# Allegro board board1.brd
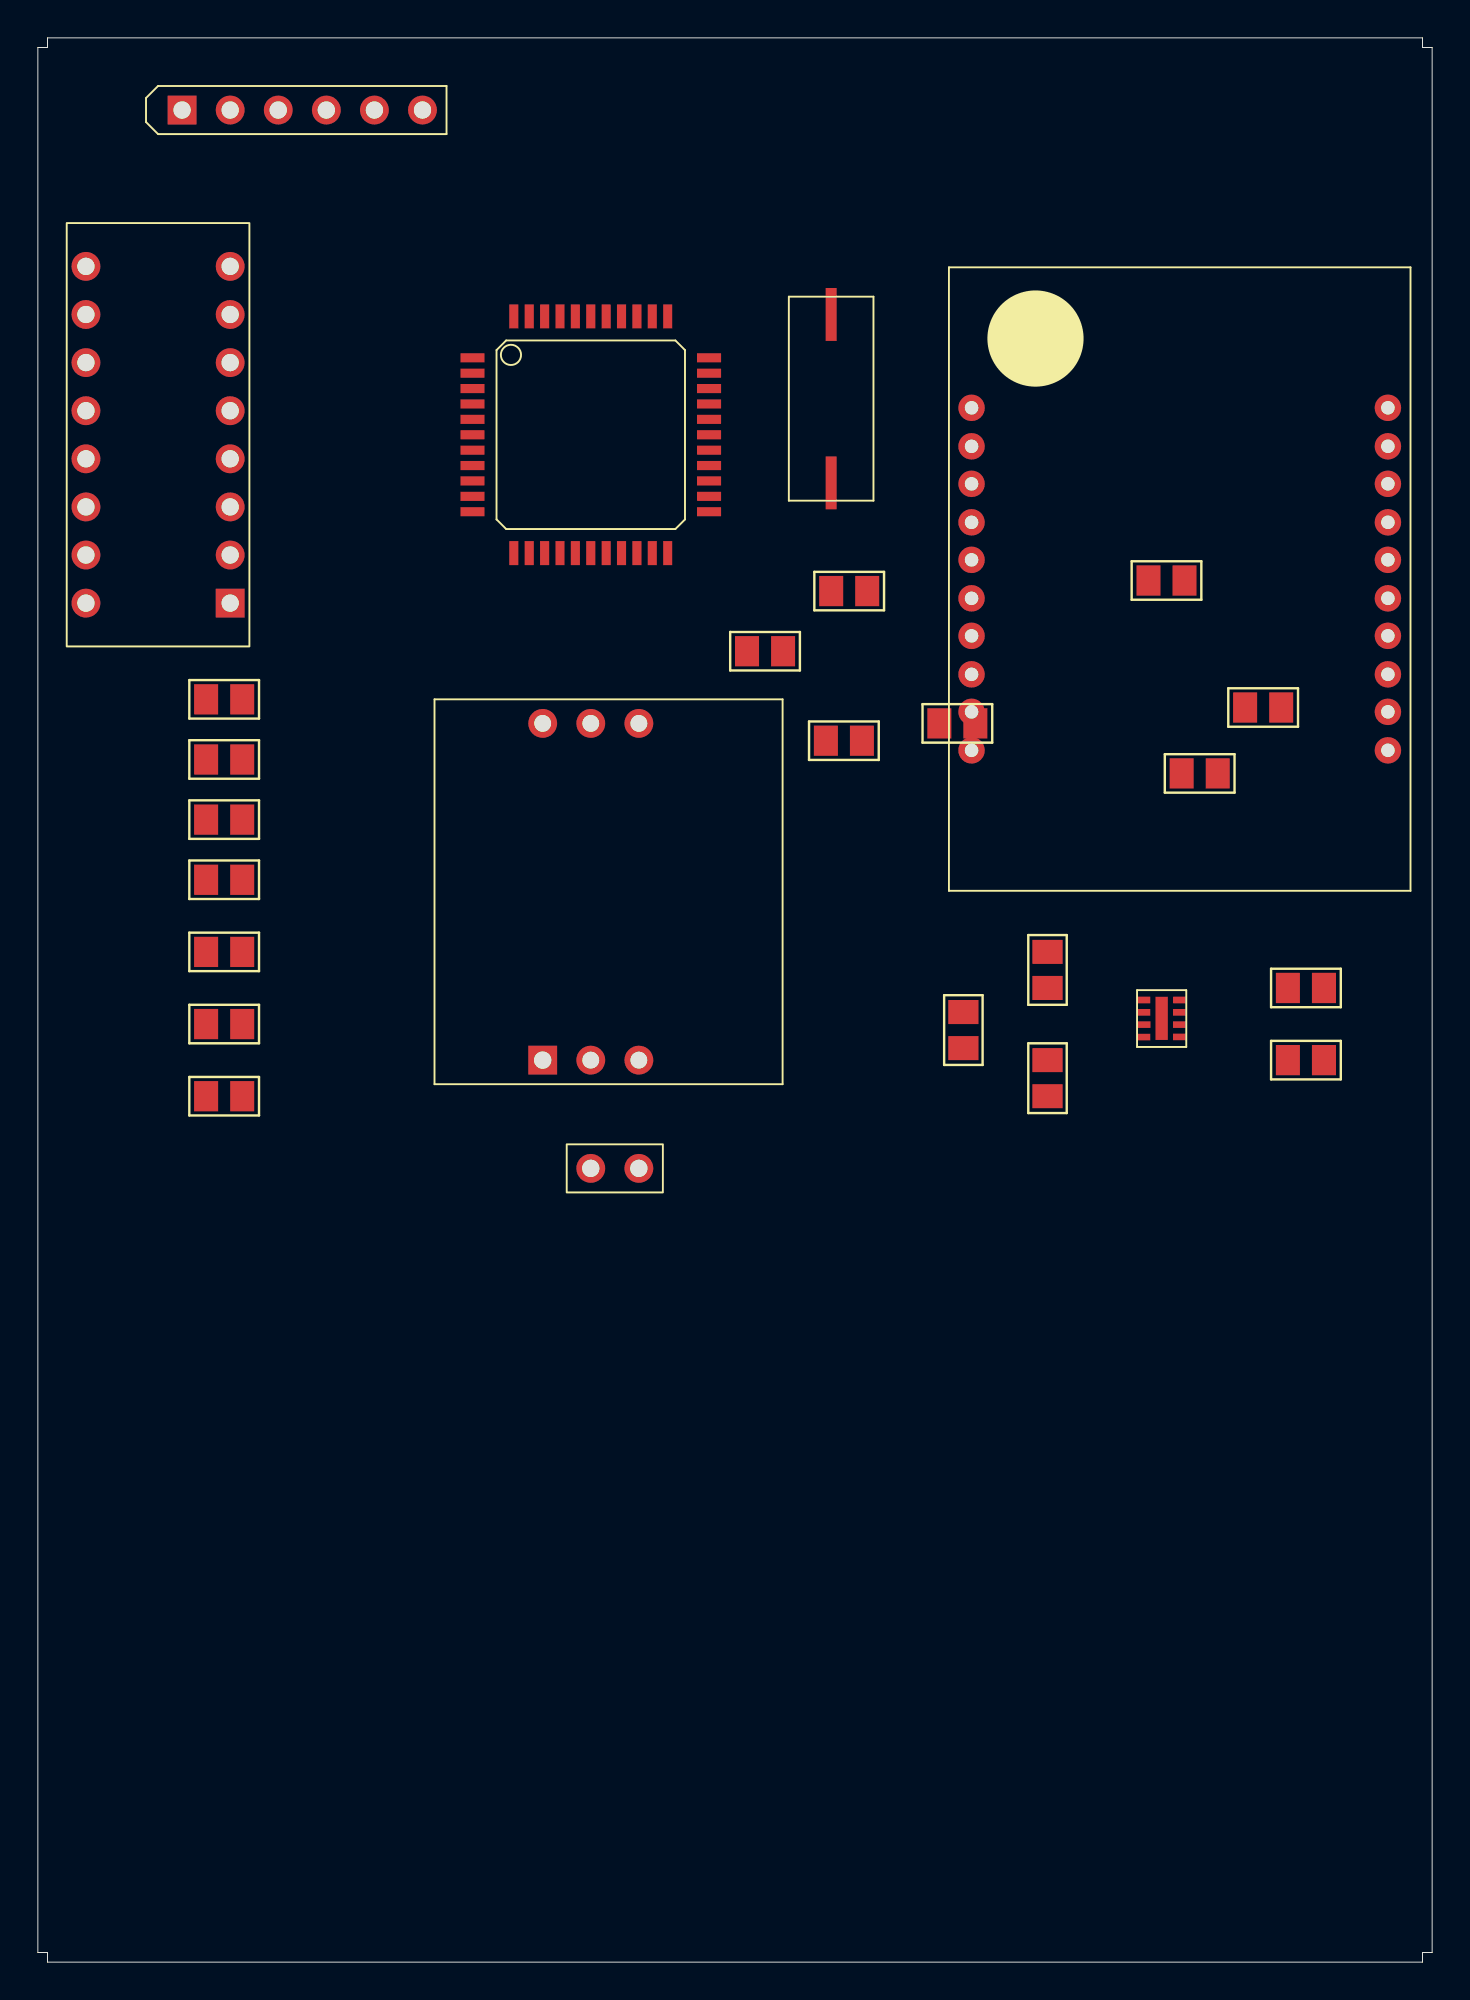
[diagram p0: board, top side]
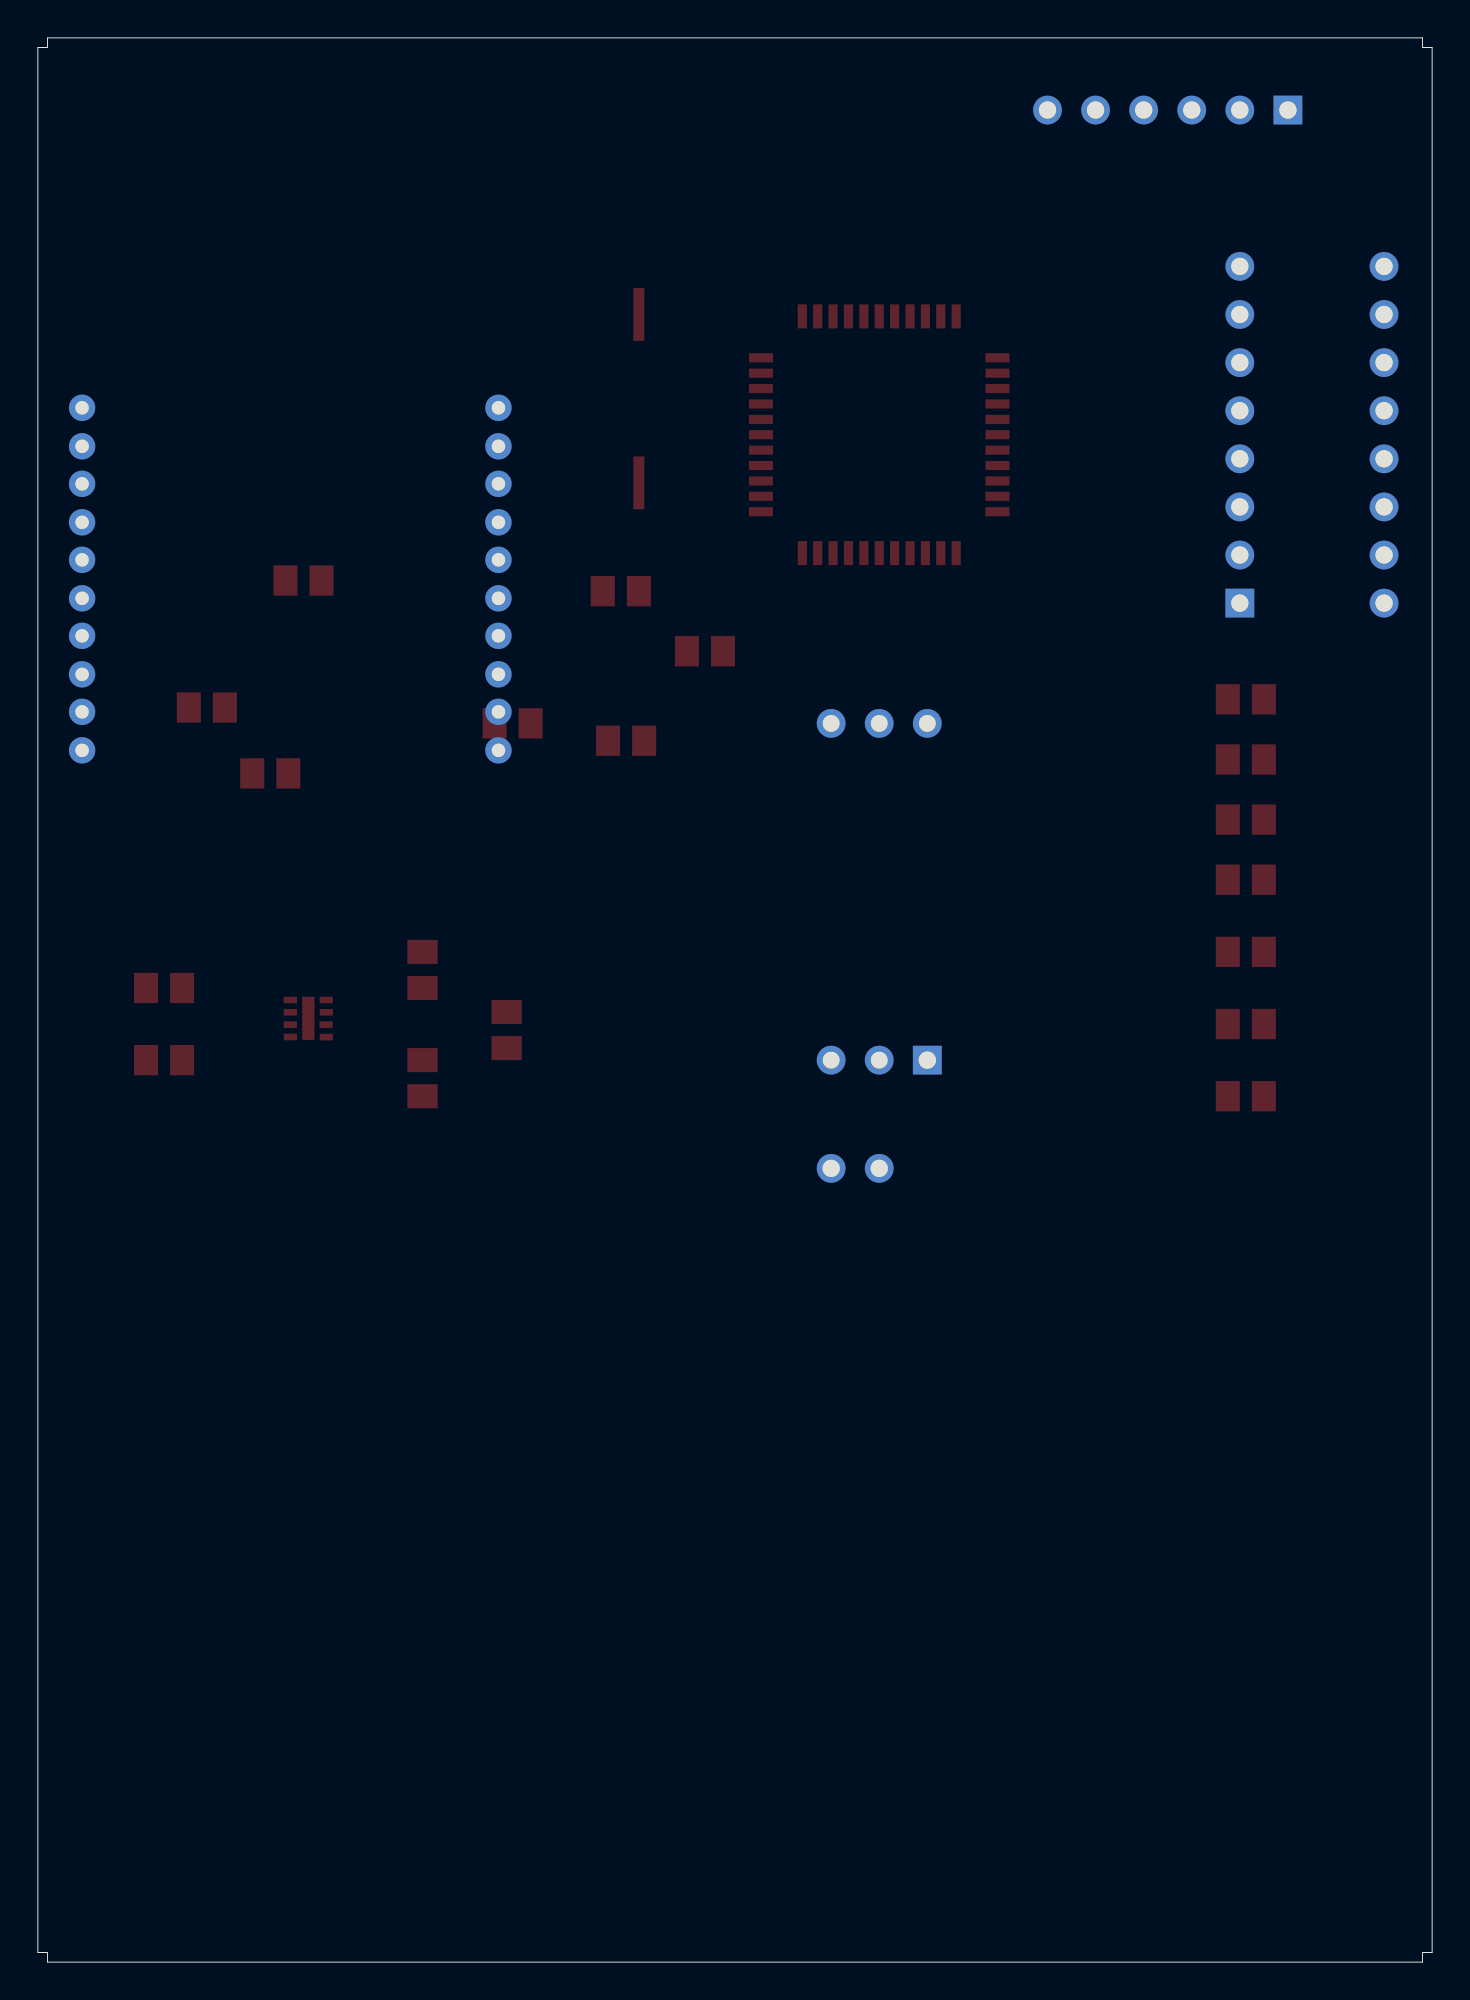
[diagram p1: board, bottom side, seen from below]

Outline 73.66 x 101.6 mm; copper layers: TOP, BOTTOM. Coordinates in mm from the lower left corner of the outline.
Outline path: 0,101.09 0.51,101.09 0.51,101.6 73.15,101.6 73.15,101.09 73.66,101.09 73.66,0.51 73.15,0.51 73.15,0 0.51,0 0.51,0.51 0,0.51 0,101.09

## Design rules (mm)
nets with their own width: min track width 0.381; nets CAPTEURRX CAPTEURTX N45185 N45221 N45265 N45305 N56544 N56546 N56548 N56550 N56552 N56554 N56556 N56558 N61373 N61405 N73074 N73078 XBEEDIN XBEEDOUT XBEERESET XBEESLEEP
nets with their own width: min track width 0.635; nets 3.3V 4.2V 5V GND

## Placement (name value [footprint] x y rotation side)
C1  10.0uF  [C_0805]  67.94 47.62 180 top
C2  10.0uF  [C_0805]  53.34 45.72 90 top
C3  470pF  [C_0805]  67.94 51.43 180 top
C4  27pF  [C_0805]  37.46 69.22 0 top
C5  27pF  [C_0805]  41.91 72.39 0 top
C6  10uF  [C_0805]  47.62 65.41 0 top
C7  0.1 uF  [C_0805]  63.78 66.24 0 top
C8  0.1 uF  [C_0805]  58.67 72.95 0 top
J1  Convertion Board  [CONDUCTIVITY_SENSOR]  20.95 46.35 90 top
J2  BNC au capteur  [JUMPER2]  29.21 41.91 0 top
J3  Xbee  [XBEE]  60.33 73.03 0 top
J4  Connecteur PicKit  [SIP6]  7.62 97.79 90 top
R1  80.6k  [R_0805]  53.34 53.34 270 top
R2  69.8k  [R_0805]  48.89 48.26 90 top
R3  4.7K  [R_0805]  60.43 62.76 0 top
R4  10K  [R_0805]  8.89 66.67 0 top
R5  10K  [R_0805]  8.89 63.5 0 top
R6  10K  [R_0805]  8.89 60.32 0 top
R7  10K  [R_0805]  8.89 57.15 0 top
R8  10K  [R_0805]  8.89 53.34 0 top
R9  10K  [R_0805]  8.89 49.53 0 top
R10  10K  [R_0805]  8.89 45.72 0 top
R11  10K  [R_0805]  41.63 64.49 0 top
SW1  SW DIP-8  [DIPSWITCH]  10.16 71.75 180 top
U1  LM104/TO  [LMZ10500_2]  58.42 50.8 0 top
U2  PIC18F47J13  [PQFP44]  29.21 80.64 0 top
Y1  4Mhz CRYSTAL  [CRYSTAL_SMD]  41.91 82.55 270 top

## Library data of the parts
C1-C3 = C
C4-C6 = CAPACITOR NON-POL
C7 C8 = CAP NP
J1 = HEADER 3X2_1
J2 = BNC: User Part Number: ***
J3 = HEADER 11X2_1
J4 = HEADER 6_0: User Part Number: ***
R1 R2 = r
R3 = RESISTOR
R4-R11 = R
SW1 = SW DIP-8: User Part Number: ***
U1 = LM104/TO_1
U2 = PIC16C67_1: Tolerance: ***; User Part Number: ***
Y1 = CRYSTAL

## Footprints (pads in the part's own frame, mm; a bottom-side part is the same pattern mirrored in y, then rotated)
C_0805
  rect 1.27x1.6 smd: 1(0,0) 2(1.905,0)
CONDUCTIVITY_SENSOR
  rect 1.524x1.524 hole 0.914: 1(1.27,-5.715)
  round 1.524 hole 0.889: 2(1.27,-8.255) 3(1.27,-10.795) 4(19.05,-10.795) 5(19.05,-8.255) 6(19.05,-5.715)
CRYSTAL_SMD
  rect 2.794x0.584 smd: 1(-4.445,0) 2(4.445,0)
DIPSWITCH
  rect 1.524x1.524 hole 0.914: 1(0,0)
  round 1.524 hole 0.914: 2(0,-2.54) 3(0,-5.08) 4(0,-7.62) 5(0,-10.16) 6(0,-12.7) 7(0,-15.24) 8(0,-17.78) 9(7.62,-17.78) 10(7.62,-15.24) 11(7.62,-12.7) 12(7.62,-10.16) 13(7.62,-7.62) 14(7.62,-5.08) 15(7.62,-2.54) 16(7.62,0)
JUMPER2
  round 1.524 hole 0.914: 1(0,0) 2(2.54,0)
LMZ10500_2
  rect 0.7x0.35 smd: 1(0,0) 2(0,-0.65) 3(0.01,-1.3) 4(0,-1.96) 5(1.9,-1.95) 6(1.9,-1.3) 7(1.9,-0.65) 8(1.9,0)
  rect 0.65x2.28 smd: 9(0.95,-0.97)
PQFP44
  rect 1.27x0.483 smd: 1(-6.248,4.064) 2(-6.248,3.251) 3(-6.248,2.438) 4(-6.248,1.626) 5(-6.248,0.813) 6(-6.248,0) 7(-6.248,-0.813) 8(-6.248,-1.626) 9(-6.248,-2.438) 10(-6.248,-3.251) 11(-6.248,-4.064) 23(6.248,-4.064) 24(6.248,-3.251) 25(6.248,-2.438) 26(6.248,-1.626) 27(6.248,-0.813) 28(6.248,0) 29(6.248,0.813) 30(6.248,1.626) 31(6.248,2.438) 32(6.248,3.251) 33(6.248,4.064)
  rect 0.483x1.27 smd: 12(-4.064,-6.248) 13(-3.251,-6.248) 14(-2.438,-6.248) 15(-1.626,-6.248) 16(-0.813,-6.248) 17(0,-6.248) 18(0.813,-6.248) 19(1.626,-6.248) 20(2.438,-6.248) 21(3.251,-6.248) 22(4.064,-6.248) 34(4.064,6.248) 35(3.251,6.248) 36(2.438,6.248) 37(1.626,6.248) 38(0.813,6.248) 39(0,6.248) 40(-0.813,6.248) 41(-1.626,6.248) 42(-2.438,6.248) 43(-3.251,6.248) 44(-4.064,6.248)
R_0805
  rect 1.27x1.6 smd: 1(0,0) 2(1.905,0)
SIP6
  rect 1.524x1.524 hole 0.914: 1(0,0)
  round 1.524 hole 0.914: 2(0,-2.54) 3(0,-5.08) 4(0,-7.62) 5(0,-10.16) 6(0,-12.7)
XBEE
  round 1.397 hole 0.711: 1(-10.998,9.042) 2(-10.998,7.01) 3(-10.998,5.029) 4(-10.998,2.997) 5(-10.998,1.016) 6(-10.998,-1.016) 7(-10.998,-2.997) 8(-10.998,-5.029) 9(-10.998,-7.01) 10(-10.998,-9.042) 11(10.998,-9.042) 12(10.998,-7.01) 13(10.998,-5.029) 14(10.998,-2.997) 15(10.998,-1.016) 16(10.998,1.016) 17(10.998,2.997) 18(10.998,5.029) 19(10.998,7.01) 20(10.998,9.042)

## Nets
3.3V: C2.2 J1.1 J3.2 J4.2 R3.1 R4.2 R5.2 R6.2 R7.2 R8.2 R9.2 R10.2 R11.2 U1.3(FB) U1.5(VOUT) U2.7(VDD1) U2.22(RA3) U2.28(VDD2)
4.2V: C1.2 U1.7(VIN)
5V: C7.1 C8.1
GND: C1.1 C2.1 C3.1 C4.1 C5.1 C6.2 C7.2 C8.2 J1.4(GND) J3.1 J3.10 J4.3 R2.1 SW1.9(B8) SW1.10(B7) SW1.11(B6) SW1.12(B5) SW1.13(B4) SW1.14(B3) SW1.15(B2) SW1.16(B1) U1.4(SGND) U1.6(PGND#6) U1.9(PGND#9) U2.6(VSS1) U2.21(RA2) U2.29(VSS2)
CAPTEURRX: J1.6 U2.14(RB4)
CAPTEURTX: J1.5 U2.15(RB5)
XBEEDIN: J3.4 U2.1(RC7)
XBEEDOUT: J3.3 U2.44(RC6)
XBEERESET: J3.6 U2.36(RC2)
XBEESLEEP: J3.9 U2.25(RE0)
N45185: C6.1 U2.23(VDDCORE)
N45221: J4.5 U2.16(RB6)
N45265: J4.4 U2.17(RB7)
N45305: J4.1 R3.2 U2.18(M\C\L\R\)
N56544: R4.1 SW1.1(A1) U2.5(RD7)
N56546: R5.1 SW1.2(A2) U2.4(RD6)
N56548: R6.1 SW1.3(A3) U2.3(RD5)
N56550: R7.1 SW1.4(A4) U2.2(RD4)
N56552: R8.1 SW1.5(A5) U2.41(RD3)
N56554: R9.1 SW1.6(A6) U2.40(RD2)
N56556: R10.1 SW1.7(A7) U2.39(RD1/SDA2)
N56558: R11.1 SW1.8(A8) U2.38(RD0/SCL2)
N61373: J1.2 J2.1(CENTER)
N61405: J1.3 J2.2(SHIELD)
N73074: R1.2 U1.2(VCON)
N73078: C3.2 R1.1 R2.2 U1.8(VREF)
N78069: C4.2 U2.30(OSC1/RA7) Y1.2
N78169: C5.2 U2.31(OSC2/RA6) Y1.1

Pads without a net: J3 5 7 8 11 12 13 14 15 16 17 18 19 20; J4 6; U1 1; U2 8 9 10 11 12 13 19 20 24 26 27 32 33 34 35 37 42 43
